# Allegro board RAK833_RPIGATEWAY.brd
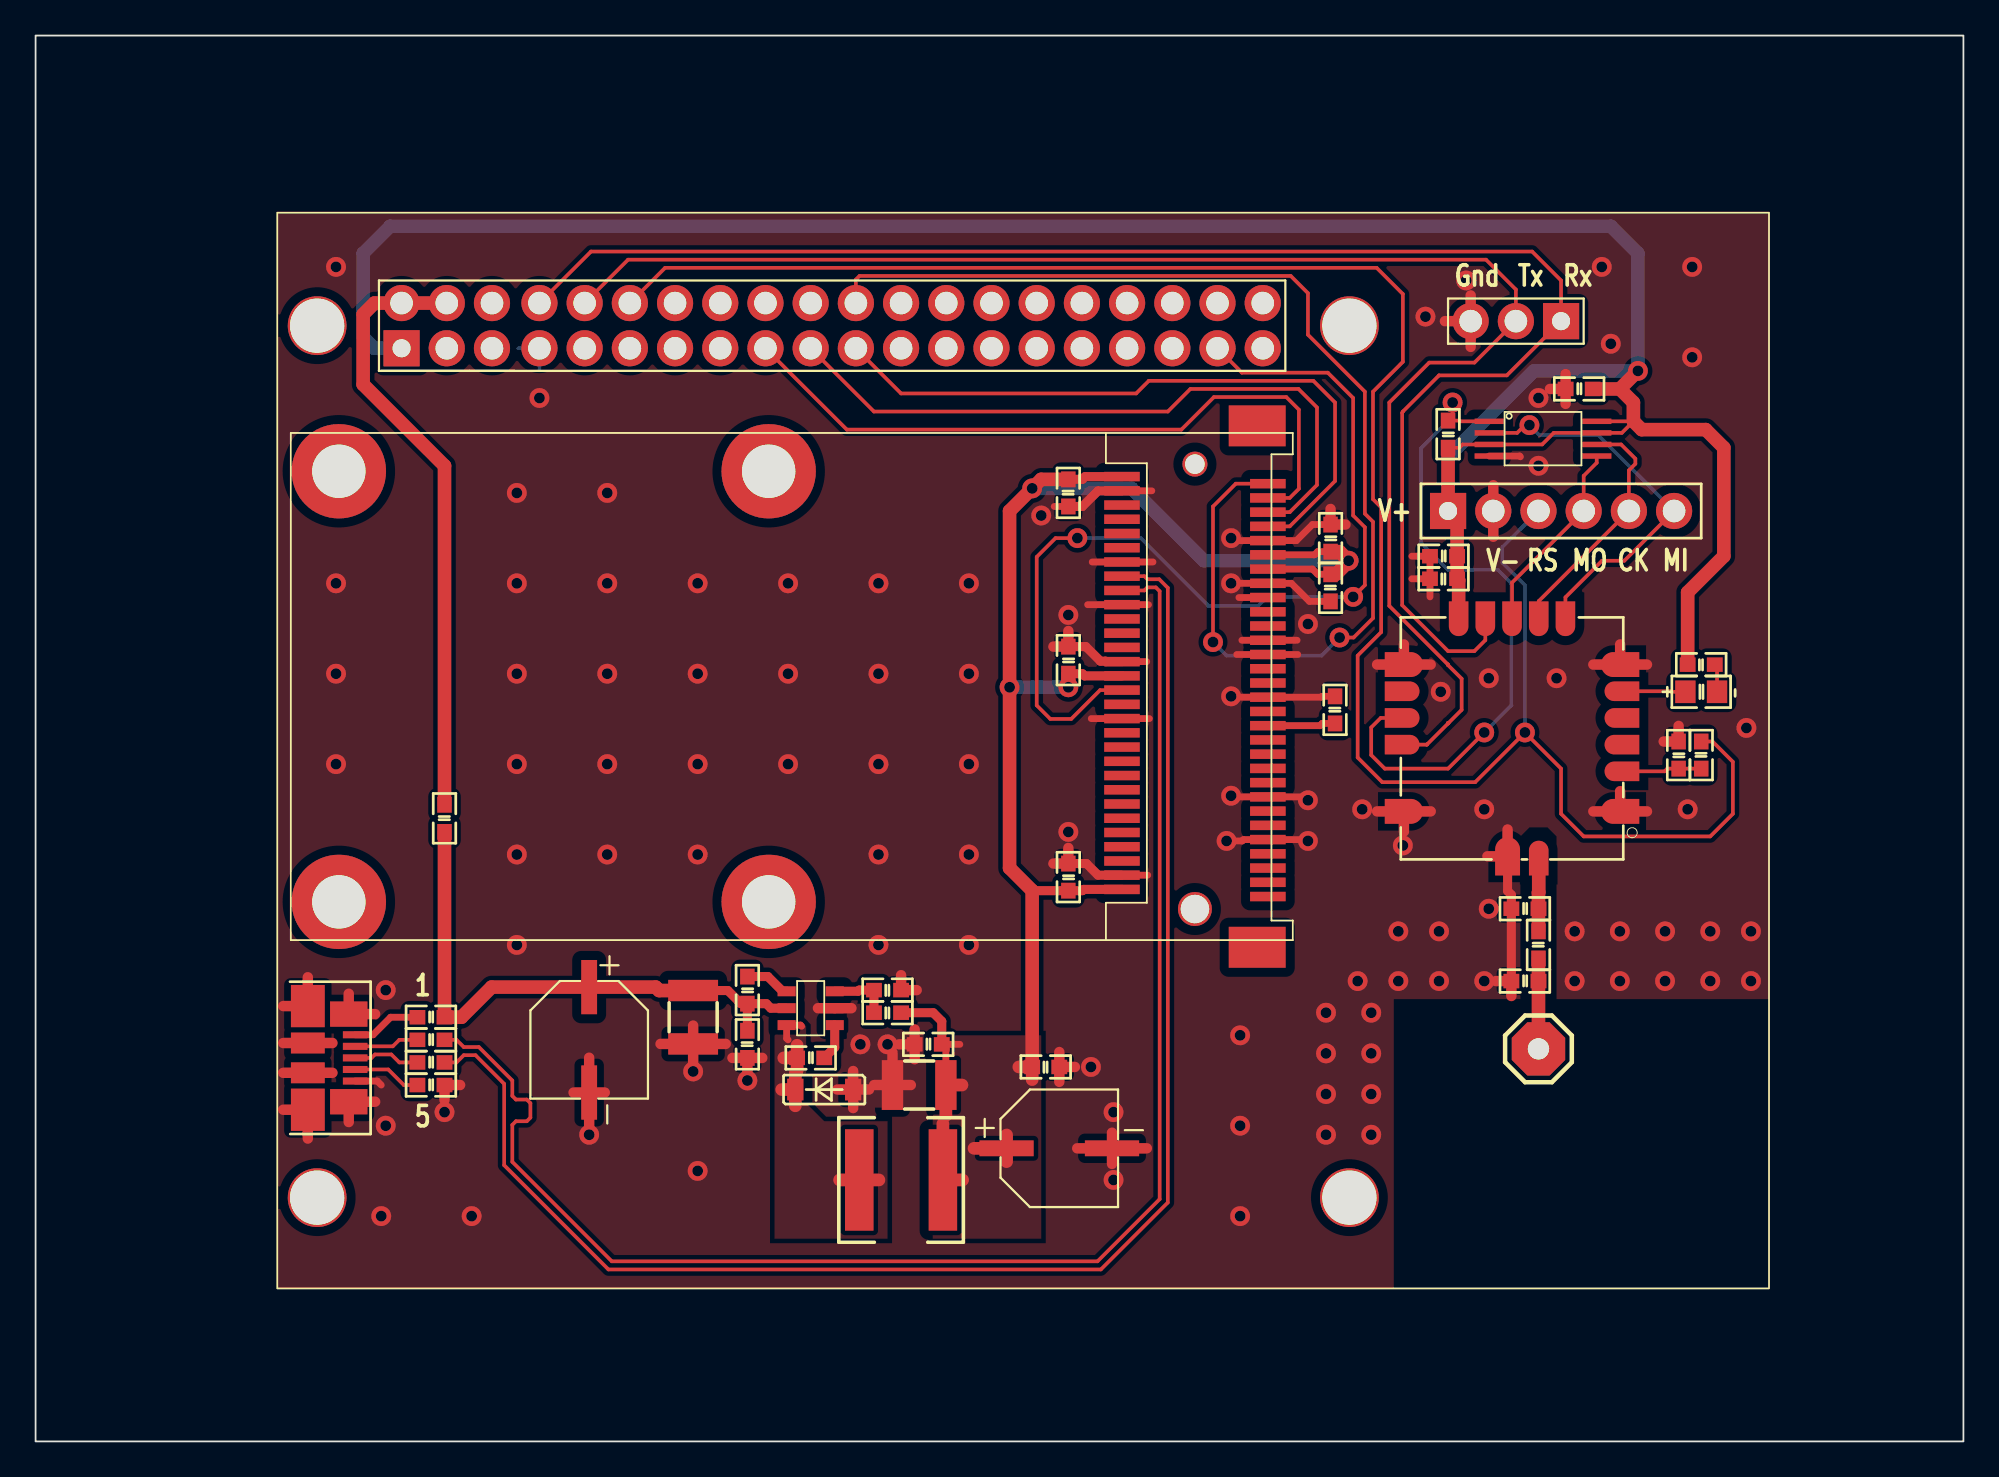
[diagram p0: board, top side]
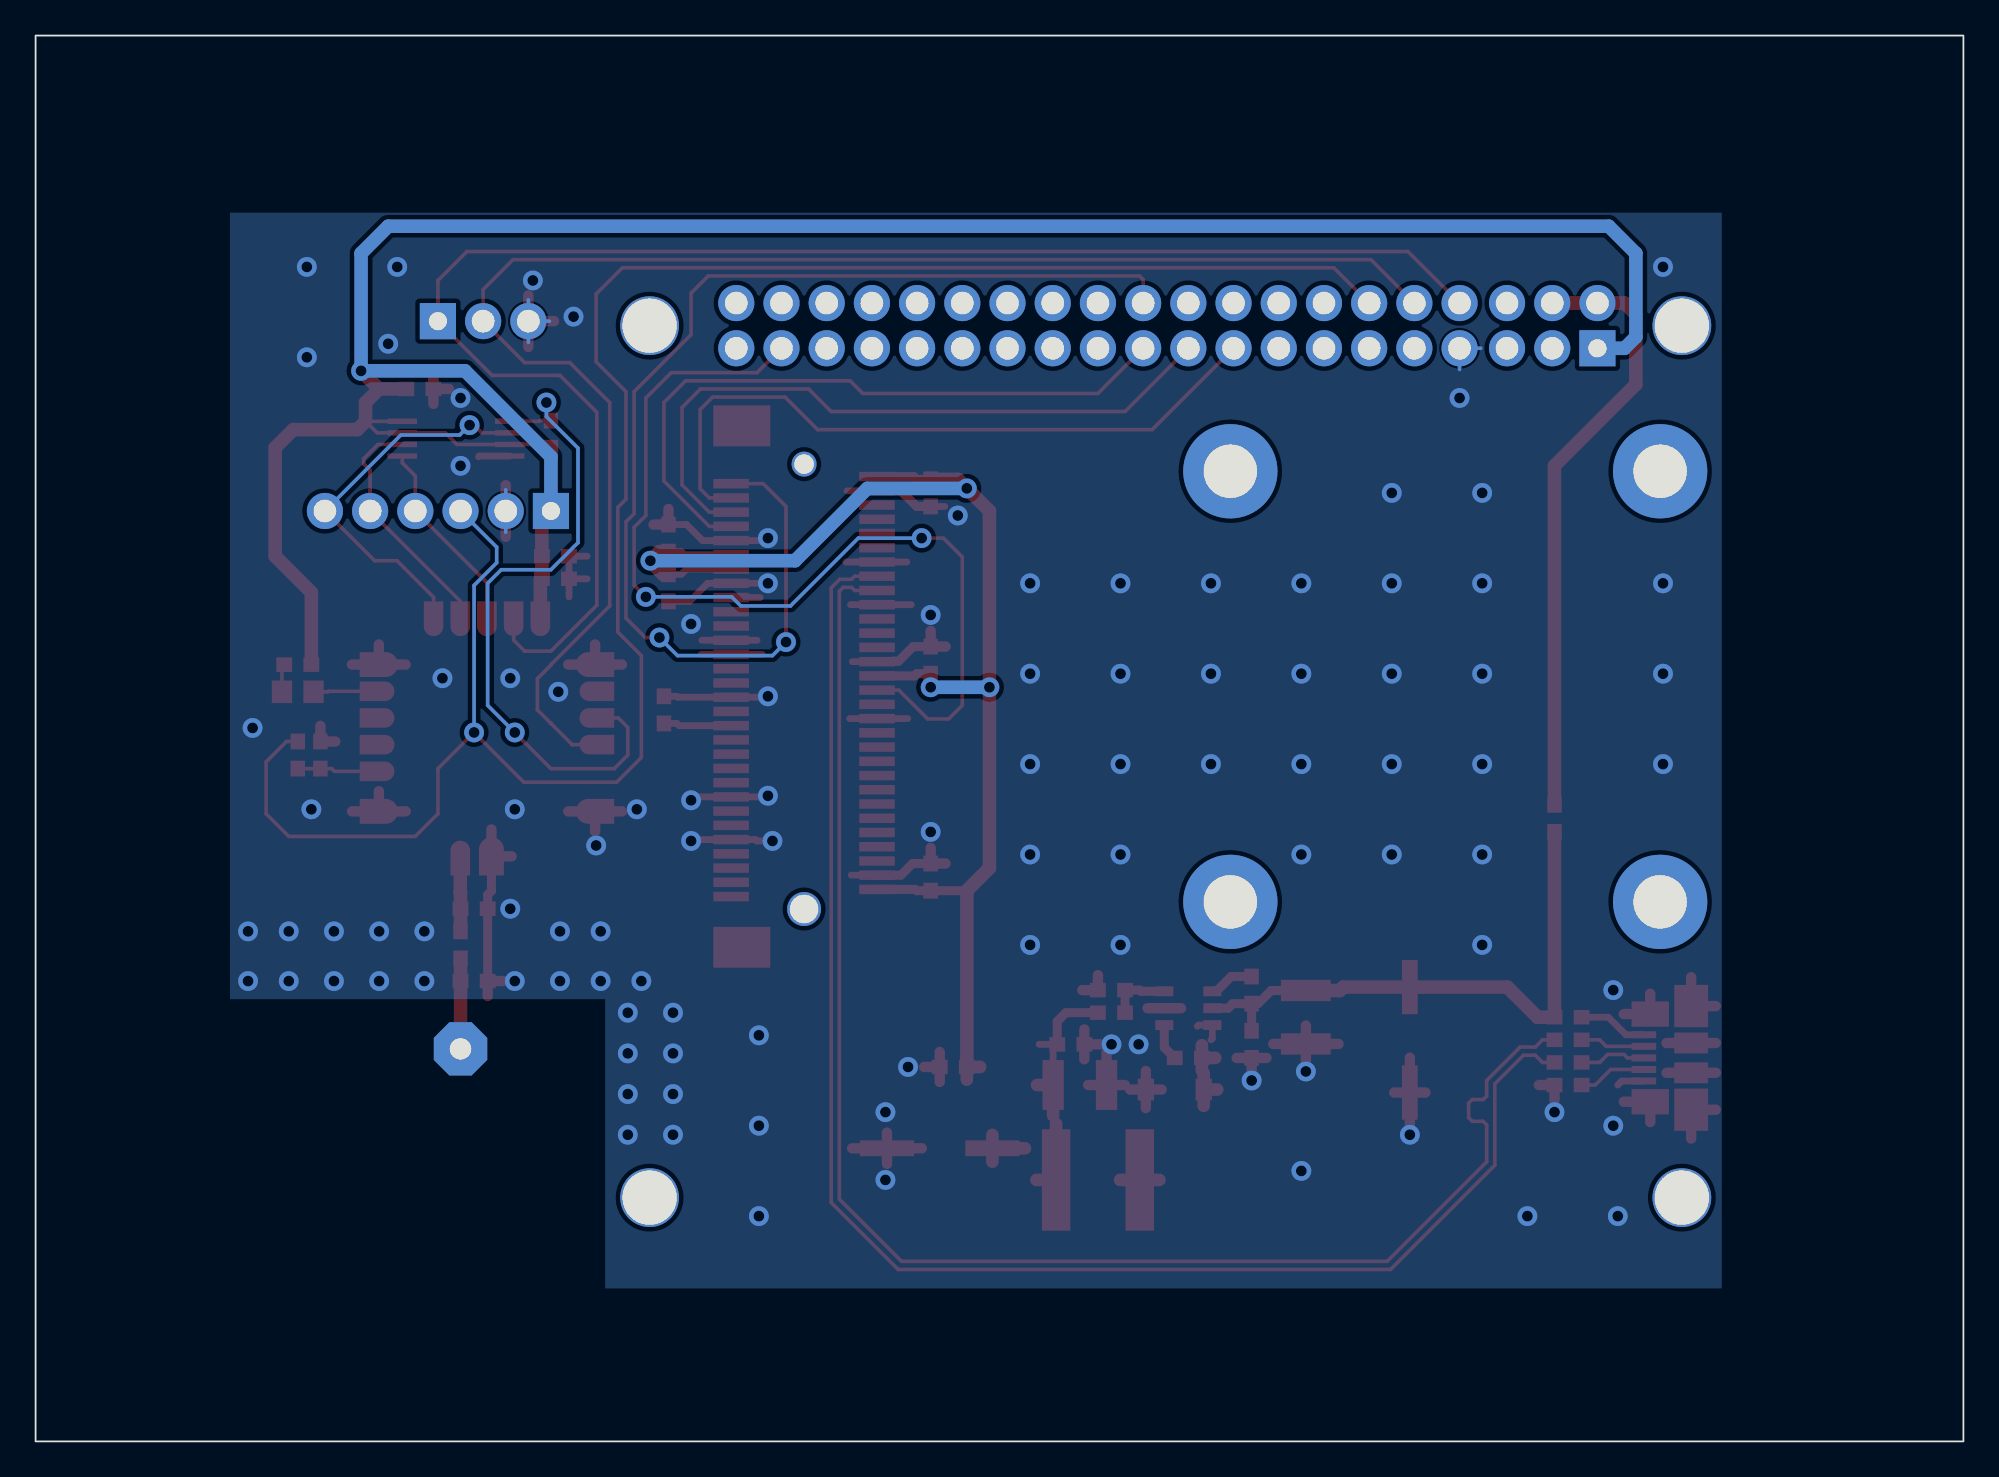
[diagram p1: board, bottom side, seen from below]

Outline 108.32 x 79 mm; copper layers: TOP, BOTTOM. Coordinates in mm from the lower left corner of the outline.
Outline path: rectangle 0,0 108.32,79

## Design rules (mm)
constraint set DEFAULT: min track width 0.203
net group MG1: nets USB_D+ USB_D-
net group MG2: nets USB_DM USB_DP

## Placement (name value [footprint] x y rotation side)
C1  10nF  [C0603]  43.55 21.55 180 top
C2  100uF/35V  [CAP_AL_D]  31.1 22.57 270 top
C3  100nF  [C0603]  39.99 22.31 270 top
C4  10u/35V  [CAP_1210]  36.95 23.84 270 top
C5  22u/6.3V  [CAP_1210]  49.65 20.03 180 top
C6  220u/16V  [CAP_AL_D]  57.52 16.47 0 top
C7  100nF  [C0603]  50.15 22.31 180 top
C8  10u/35V  [C0603]  58.03 53.3 270 top
C9  10u/35V  [C0603]  58.03 43.9 90 top
C10  10u/35V  [C0603]  58.03 31.71 90 top
C11  10u/35V  [C0603]  72.76 47.97 270 top
C12  10u/35V  [C0603]  72.76 50.76 90 top
C13  10u/35V  [C0603]  56.76 21.04 0 top
C14  0.1uF  [C0603]  79.11 48.47 0 top
C15  10uF  [C0603]  79.11 49.74 180 top
C16  0.1uF  [C0603]  92.32 38.57 90 top
C17  10pF  [C0603]  83.68 29.93 180 top
C18  6pF  [C0603]  83.68 25.87 180 top
C19  0.1uF  [C0603]  86.73 59.14 180 top
D1  1N5819  [SOD123]  44.31 19.77 0 top
D2  LED  [LED0805]  93.59 42.12 0 top
E1  ANTENNA  [HEADER_1_3MM]  84.44 22.06 0 top
J1  HEADER 20X2  [RASPERRY]  44.82 62.7 90 top
J2  HUM011D-5-S  [CON5_MICROUSB_SKT_SM]  16.63 21.55 0 top
J3  ZW_JTAG  [HEADER-6]  85.71 52.28 90 top
J14  Z_DBG  [HEADER3PITCH100MIL]  83.17 62.95 180 top
L1  8.8uH/1.7A  [IND_6X6MM]  48.63 14.69 0 top
L2  8.2nH  [C0603]  84.44 27.9 270 top
R1  10K  [R0603]  39.99 25.36 90 top
R2  30K  [R0603]  47.87 24.09 0 top
R3  10K  [R0603]  47.87 25.36 0 top
R4  0R/NC  [R0603]  22.98 35.01 270 top
R5  1R  [R0603]  73.01 41.11 270 top
R6  0R/NC  [R0603]  22.21 23.84 180 top
R7  22R  [R0603]  22.21 22.57 180 top
R8  22R  [R0603]  22.21 21.3 180 top
R9  0R/NC  [R0603]  22.21 20.03 180 top
R10  22  [R0603]  93.59 38.57 270 top
R11  360  [R0603]  93.59 43.65 0 top
R12  10K  [R0603]  79.36 56.6 90 top
U1  AP3211  [SOT23-6]  43.55 24.34 180 top
U2  RAK_PCIE  [CONN_PCIE_52POS]  65.14 38.57 90 top
U3  ZM5202  [ZM5202_A]  75.81 47.2 270 top
U4  CAT25256  [TSSOP-8]  84.7 56.35 0 top

## Library data of the parts
C1 C8-C14 C16 C19 = CAP NP
C2 C6 C15 = CAP
C3 C7 = Cap 0603
C4 C5 = CAP NP: User Part Number: PartNr
C17 = C-10pF/50V-SMD0805
C18 = C-6pF/50V-SMD0805
D1 = SS34_2
D2 = LED
E1 = ANTENNA_0
J1 = HEADER 20X2
J2 = USB MIN_6
J3 = HEADER 6
J14 = HEADER 3
L1 = INDUCTOR
L2 = L-8.2nH-SMD0805
R1-R3 R5 R10-R12 = RES-SM0402_0
R4 R6-R9 = RESISTOR
U1 = PMIC_SOT23-6
U2 = RAK_PCIE
U3 = ZM5202
U4 = CAT25C02_0

## Footprints (pads in the part's own frame, mm; a bottom-side part is the same pattern mirrored in y, then rotated)
C0603
  rect 0.889x0.813 smd: 1(-0.762,0) 2(0.762,0)
CAP_1210
  rect 1.2x2.8 smd: 1(-1.5,0) 2(1.5,0)
CAP_AL_D
  rect 3.048x0.889 smd: 1(-2.962,0) 2(2.962,0)
CON5_MICROUSB_SKT_SM
  rect 1.38x0.394 smd: 1(1.33,1.3) 2(1.33,0.65) 3(1.33,0) 4(1.33,-0.65) 5(1.33,-1.3)
  rect 1.9x1.175 smd: 6(-1.33,0.837) 11(-1.33,-0.837)
  rect 1.9x2.375 smd: 7(-1.33,2.913) 10(-1.33,-2.913)
  rect 2.1x1.422 smd: 8(0.97,2.463) 9(0.97,-2.463)
CONN_PCIE_52POS
  rect 2.301x3.2 smd: (-10.8,-3.5) (18.499,-3.5)
  round 1.905 hole 1.6 unplated: (-8.651,0)
  round 5.301 hole 3: (-8.25,48.1) (-8.25,23.95) (15.949,48.1) (15.949,23.95)
  round 1.405 hole 1.1 unplated: (16.35,0)
  rect 0.533x1.999 smd: 1(-7.95,-4.1) 2(-7.549,4.1) 3(-7.15,-4.1) 4(-6.749,4.1) 5(-6.35,-4.1) 6(-5.951,4.1) 7(-5.55,-4.1) 8(-5.151,4.1) 9(-4.75,-4.1) 10(-4.351,4.1) 11(-3.95,-4.1) 12(-3.551,4.1) 13(-3.15,-4.1) 14(-2.751,4.1) 15(-2.349,-4.1) 16(-1.951,4.1) 17(1.651,-4.1) 18(2.05,4.1) 19(2.451,-4.1) 20(2.85,4.1) 21(3.251,-4.1) 22(3.65,4.1) 23(4.051,-4.1) 24(4.45,4.1) 25(4.851,-4.1) 26(5.25,4.1) 27(5.652,-4.1) 28(6.05,4.1) 29(6.452,-4.1) 30(6.85,4.1) 31(7.252,-4.1) 32(7.651,4.1) 33(8.052,-4.1) 34(8.451,4.1) 35(8.852,-4.1) 36(9.251,4.1) 37(9.652,-4.1) 38(10.051,4.1) 39(10.452,-4.1) 40(10.851,4.1) 41(11.252,-4.1) 42(11.651,4.1) 43(12.052,-4.1) 44(12.451,4.1) 45(12.852,-4.1) 46(13.251,4.1) 47(13.65,-4.1) 48(14.049,4.1) 49(14.45,-4.1) 50(14.849,4.1) 51(15.25,-4.1) 52(15.649,4.1) A1(-1.549,-4.1) A2(-1.151,4.1) A3(-0.749,-4.1) A4(-0.35,4.1) A5(0.051,-4.1) A6(0.45,4.1) A7(0.851,-4.1) A8(1.25,4.1)
HEADER3PITCH100MIL
  rect 2.032x2.032 hole 1.016: 1(-2.54,0)
  round 2.032 hole 1.27: 2(0,0) 3(2.54,0)
HEADER-6
  rect 2.032x2.032 hole 1.016: 1(0,6.35)
  round 2.032 hole 1.27: 2(0,3.81) 3(0,1.27) 4(0,-1.27) 5(0,-3.81) 6(0,-6.35)
HEADER_1_3MM
  rrect 3x3 hole 1.2: 1(0,0)
IND_6X6MM
  rect 1.6x5.7 smd: 1(-2.35,0) 2(2.35,0)
LED0805
  rect 1.143x1.27 smd: 1(-0.889,0) 2(0.889,0)
R0603
  rect 0.889x0.813 smd: 1(-0.762,0) 2(0.762,0)
RASPERRY
  round 3.302 hole 3.048: (-49,29) (-49,-29) (0,29) (0,-29)
  rect 2.032x2.032 hole 1.016: 1(-1.27,24.257)
  round 2.032 hole 1.27: 2(1.27,24.257) 3(-1.27,21.717) 4(1.27,21.717) 5(-1.27,19.177) 6(1.27,19.177) 7(-1.27,16.51) 8(1.27,16.51) 9(-1.27,13.97) 10(1.27,13.97) 11(-1.27,11.43) 12(1.27,11.43) 13(-1.27,8.89) 14(1.27,8.89) 15(-1.27,6.35) 16(1.27,6.35) 17(-1.27,3.81) 18(1.27,3.81) 19(-1.27,1.27) 20(1.27,1.27) 21(-1.27,-1.27) 22(1.27,-1.27) 23(-1.27,-3.81) 24(1.27,-3.81) 25(-1.27,-6.35) 26(1.27,-6.35) 27(-1.27,-8.89) 28(1.27,-8.89) 29(-1.27,-11.43) 30(1.27,-11.43) 31(-1.27,-13.97) 32(1.27,-13.97) 33(-1.27,-16.51) 34(1.27,-16.51) 35(-1.27,-19.05) 36(1.27,-19.05) 37(-1.27,-21.59) 38(1.27,-21.59) 39(-1.27,-24.13) 40(1.27,-24.13)
SOD123
  rect 0.914x1.219 smd: 1(1.626,0) 2(-1.626,0)
SOT23-6
  rect 1.016x0.559 smd: 1(-1.35,0.95) 2(-1.35,0) 3(-1.35,-0.95) 4(1.35,-0.95) 5(1.35,0) 6(1.35,0.95)
TSSOP-8
  rect 1.651x0.305 smd: 1(-3.017,0.975) 2(-3.017,0.325) 3(-3.017,-0.325) 4(-3.017,-0.975) 5(3.017,-0.975) 6(3.017,-0.325) 7(3.017,0.325) 8(3.017,0.975)
ZM5202_A
  custom 1.4x2.15 smd: 1(11.8,13.225) 6(3.55,13.225) 12(3.55,1.075) 16(11.8,1.075)
  custom 1.1x1.95 smd: 2(9.55,13.325) 3(8.05,13.325) 4(6.55,13.325) 5(5.05,13.325) 13(5.05,0.975) 14(6.55,0.975) 15(8.05,0.975)
  custom 1.95x1.1 smd: 7(0.975,10.15) 8(0.975,8.65) 9(0.975,7.15) 10(0.975,5.65) 11(0.975,4.15) 18(14.425,8.65)
  custom 2.15x1.4 smd: 17(14.325,6.9)

## Nets
3.3V: C5.1 C6.1 C7.1 C8.1 C9.1 C10.1 C11.1 C12.1 C13.1 L1.2 R2.2 U2.2 U2.24 U2.39 U2.41 U2.52
GND: C2.2 C3.2 C4.2 C5.2 C6.2 C7.2 C8.2 C9.2 C10.2 C11.2 C12.2 C13.2 C14.1 C15.2 C16.2 C17.2 C18.2 C19.2 D1.1 J1.7 J2.5 J2.6 J2.7 J2.8 J2.9 J2.10 J2.11 J3.2 J14.3 R3.2 R5.1 R9.1 U1.2 U2.4 U2.9(PIN9) U2.15 U2.18 U2.21 U2.26 U2.27 U2.29 U2.34 U2.35 U2.37 U2.40 U2.43 U2.50 U3.1 U3.6 U3.12 U3.16 U3.17 U4.4
VCC3.3V: C14.2 C15.1 C19.1 J1.1 J3.1 R11.1 R12.1 U3.11 U4.3(W\P\) U4.7 U4.8
VCC5V: C2.1 C3.1 C4.1 R1.1 R4.2 R6.1 U1.5
ANTEN: C18.1 E1.1 L2.2
EXTERNALGPS: U2.19
LED: D2.1(CATHODE) U3.5
RF: C17.1 L2.1 U3.18
SPDT_SEL: R5.2 U2.17
SPI_CE: J1.22 U2.51
SPI_CLK: J1.21 U2.45
SPI_MISO: J1.19 U2.47
SPI_MOSI: J1.17 U2.49
SPI_RST: J1.37 U2.22
USB_D+: R8.1 U2.38
USB_D-: R7.1 U2.36
USB_DM: J2.2 R7.2
USB_DP: J2.3 R8.2
ZM_INT0: U3.3
ZM_INT1: U3.4
ZM_RESET: J1.12 J3.3 R10.1
ZM_RX: J1.8 J14.1 U3.10
ZM_TX: J1.10 J14.2 U3.15
ZWAVE_SPI_CS: R12.2 U3.14(ZEROX) U4.1
ZWAVE_SPI_MISO: J3.6 U3.7 U4.2
ZWAVE_SPI_MOSI: J3.4 U3.9 U4.5
ZWAVE_SPI_SCLK: J3.5 U3.8 U4.6
N7996678: C1.1 U1.1
N7996682: C1.2 D1.2(CATHODE) L1.1 U1.6(SW)
N7996842: R1.2 U1.4
N7996854: R2.1 R3.1 U1.3
N7997918: C16.1 R10.2 U3.2
N7999815: J2.1 R6.2
N7999903: J2.4(ID) R9.2
N8000066: J1.2 J1.4 R4.1
N79981601: D2.2 R11.2

Pads without a net: J1 3 5 6 9 11 13 14 15 16 18 20 23 24 25 26 27 28 29 30 31 32 33 34 35 36 38 39 40; U2 1 3 5 6 7 8 10 11 12 13 14 16 20 23 25 28 30 31 32 33 42 44 46 48 A1 A2 A3 A4 A5 A6 A7 A8; U3 13

## Via types
v1: diameter 1.118, hole 0.61, TOP to BOTTOM, 115 vias

## Routing (per net, layer and track width the routed paths; a pad name or vN(x,y) marks a point on that pad's centre or on a via; arc(x,y) is an arc through that point)
3.3V: length 99.2
  TOP w0.381: C5.1 51.15,22.08 C7.1 51.93,22.31 ; C12.1 72.04,50 71.86,49.82 U2.41 ; U2.39 71.74,49.02 72.04,48.73 C11.1
  TOP w0.508: C8.1 58.82,54.06 58.97,54.22 U2.52 ; R2.2 50.43,24.09 50.92,23.61 C7.1 ; C9.1 58.82,43.14 58.94,43.02 U2.24 ; U2.2 58.89,31.02 58.82,30.95 C10.1 56,30.95
  TOP w0.711: 50.98,17.85 L1.2 52.08,14.69 ; 56,20.33 C13.1 55.25,21.04 ; 51.15,18.32 C5.1 52.05,20.03 ; 54.56,15.72 C6.1 ; C6.1 54.56,17.22 ; C6.1 52.73,16.47
  TOP w0.762: C13.1 56,30.95 54.73,32.22 v1(54.73,42.38) 54.73,52.28 v1(56,53.55) 56.5,54.06 C8.1 ; C11.1 73.06,48.73 73.78,49.45 v1(73.78,49.49) 73.27,50 C12.1 ; C9.1 v1(58.03,42.38)
  BOTTOM w0.762: v1(56,53.55) 61.58,53.55 65.65,49.49 v1(73.78,49.49) ; v1(58.03,42.38) v1(54.73,42.38)
GND: length 175.8
  TOP w0.381: U2.50 62.72,53.42 ; 70.88,45.02 U2.29 67.78,45.02 ; U2.35 67.61,47.42 ; v1(67.17,50.76) 67.31,50.62 U2.43 70.84,50.62 71.74,51.52 C12.2 ; C14.1 77.33,48.47 ; C14.1 78.35,47.46 ; C14.1 C15.2 77.33,49.74 ; v1(67.17,48.22) U2.37 70.56,48.22 71.57,47.2 C11.2 ; U4.4 83.39,55.37 83.43,55.33 ; 59.37,49.42 U2.40 62.78,49.42 ; 67.49,44.22 U2.27 70.92,44.22 ; 19.42,20.03 19.2,20.25 J2.5 ; v1(67.17,41.87) 67.22,41.82 U2.21 72.24,41.82 72.29,41.87 R5.1 ; C8.2 57.24,52.54 ; v1(66.92,33.74) 67.79,33.74 67.87,33.82 U2.9 71.41,33.82 v1(71.49,33.74) ; U2.26 62.43,43.82 ; 62.53,47.02 U2.34 59.11,47.02 ; U2.4 62.49,31.82 ; v1(67.17,36.28) 67.24,36.22 U2.15 71.3,36.22 v1(71.49,36.03) ; 59.32,40.62 U2.18 62.58,40.62
  TOP w0.508: U2.4 59.7,31.82 59.04,32.47 C10.2 ; U2.26 60.14,43.82 60.12,43.84 59.83,43.84 59.01,44.66 C9.2 ; U2.50 59.69,53.42 58.82,52.54 C8.2 ; C18.2 C17.2 82.92,30.72 82.71,30.93 U3.17
  TOP w0.584: 22.98,19.19 R9.1 23.85,20.03 ; 58.03,33.35 C10.2 57.19,32.47 ; 82.04,25.87 C18.2 82.92,25.03 ; 81.9,53.73 J3.2 81.9,50.84 ; C5.2 49.18,20.03 ; C5.2 47.11,20.03 ; C5.2 48.15,21.86 ; U3.16 78.39,35.4 ; U3.16 75.38,35.4 ; U3.16 76.88,34.27 ; 43.96,24.34 U1.2 45.84,24.34 ; 16.68,20.71 J2.11 13.91,20.71 ; U3.6 90.54,43.65 ; U3.6 87.53,43.65 ; U3.6 89.03,44.79 ; 13.91,18.64 J2.10 15.3,17.02 ; C13.2 58.4,21.04 ; C13.2 57.52,21.88 ; C13.2 57.52,20.2 ; 85.09,59.14 C19.2 ; C19.2 85.97,59.98 ; C19.2 85.97,58.3 ; 13.91,24.46 J2.7 15.3,26.08 ; 30.23,19.6 C2.2 ; C2.2 31.1,17.65 ; C2.2 31.98,19.6 ; C2.2 31.1,21.56 ; U3.1 90.54,35.4 ; U3.1 89.03,36.54 ; U3.1 87.53,35.4 ; 81.58,32.88 U3.17 82.71,34.39 ; 60.48,15.59 C6.2 ; C6.2 62.44,16.47 ; C6.2 58.53,16.47 ; C6.2 60.48,17.35 ; 49.39,21.47 C7.2 ; C7.2 48.52,22.31 ; C7.2 49.39,23.15 ; 19.08,19.09 J2.9 17.6,17.95 ; 73.6,51.52 C12.2 72.76,52.4 ; 39.16,21.55 C3.2 ; C3.2 40.83,21.55 ; C3.2 39.99,20.67 ; D1.1 46.83,19.77 ; D1.1 45.94,18.73 ; D1.1 45.94,20.81 ; D1.1 45.05,19.77 ; C4.2 36.95,23.37 ; C4.2 35.11,22.34 ; C4.2 36.95,21.3 ; C4.2 38.78,22.34 ; 79.19,62.95 J14.3 ; J14.3 80.63,61.5 ; J14.3 80.63,64.4 ; 48.63,26.2 R3.2 49.51,25.36 ; U3.12 76.88,44.79 ; U3.12 78.39,43.65 ; U3.12 75.38,43.65 ; 19.08,24.01 J2.8 17.6,25.16 ; 58.03,45.54 C9.2 57.19,44.66 ; 16.68,22.39 J2.6 13.91,22.39 ; 92.32,40.21 C16.2 91.48,39.33
  BOTTOM w0.203: 81.9,51.09 J3.2 81.9,53.48 ; J14.3 80.63,64.15 ; J14.3 79.44,62.95 ; J14.3 80.63,61.76 ; 28.31,60.23 J1.7 27.12,61.43
  vias: v1(16.88,66) v1(16.88,48.22) v1(16.88,43.14) v1(16.88,38.06) v1(19.42,12.66) v1(19.67,25.36) v1(19.67,17.74) v1(22.98,18.5) v1(24.5,12.66) v1(27.04,53.3) v1(27.04,48.22) v1(27.04,43.14) v1(27.04,38.06) v1(27.04,32.98) v1(27.04,27.9) v1(28.31,58.63) v1(31.1,17.23) v1(32.12,53.3) v1(32.12,48.22) v1(32.12,43.14) v1(32.12,38.06) v1(32.12,32.98) v1(36.95,20.79) v1(37.2,48.22) v1(37.2,43.14) v1(37.2,38.06) v1(37.2,32.98) v1(37.2,15.2) v1(39.99,20.28) v1(42.28,48.22) v1(42.28,43.14) v1(42.28,38.06) v1(46.34,22.31) v1(47.36,48.22) v1(47.36,43.14) v1(47.36,38.06) v1(47.36,32.98) v1(47.36,27.9) v1(47.87,22.31) v1(52.44,48.22) v1(52.44,43.14) v1(52.44,38.06) v1(52.44,32.98) v1(52.44,27.9) v1(56.5,52.03) v1(58.03,46.44) v1(58.03,34.25) v1(59.3,21.04) v1(60.57,18.5) v1(60.57,14.69) v1(67.68,22.82) v1(67.68,17.74) v1(67.68,12.66) v1(71.49,45.93) v1(72.51,24.09) v1(72.51,21.8) v1(72.51,19.52) v1(72.51,17.23) v1(74.28,25.87) v1(74.54,35.52) v1(75.05,24.09) v1(75.05,21.8) v1(75.05,19.52) v1(75.05,17.23) v1(76.57,28.66) v1(76.57,25.87) v1(76.82,33.49) v1(78.09,63.21) v1(78.86,28.66) v1(78.86,25.87) v1(78.95,42.12) v1(80.38,65.24) v1(81.4,35.52) v1(81.4,25.87) v1(81.65,42.89) v1(81.65,29.93) v1(84.44,58.63) v1(84.44,54.82) v1(85.46,42.89) v1(86.48,28.66) v1(86.48,25.87) v1(88,66) v1(88.51,61.68) v1(89.02,28.66) v1(89.02,25.87) v1(91.56,28.66) v1(91.56,25.87) v1(92.83,35.52) v1(93.08,66) v1(93.08,60.92) v1(94.1,28.66) v1(94.1,25.87) v1(96.13,40.09) v1(96.38,28.66) v1(96.38,25.87)
VCC3.3V: length 149.1
  TOP w0.203: U4.8 89.78,57.32 89.13,56.67 U4.7 85.3,56.67 84.65,56.02 U4.3 80.18,56.02 80,55.84 R12.1
  TOP w0.762: 89.02,59.14 C19.1 ; 89.02,59.14 89.78,58.38 89.78,57.32 90.25,56.86 93.84,56.86 94.86,55.84 94.86,49.74 92.83,47.71 R11.1 ; 89.02,59.14 v1(90.03,60.16) ; U3.11 79.96,48.39 C14.2 C15.1 79.87,51.78 J3.1 R12.1
  BOTTOM w0.762: 20.56,61.43 19.04,61.43 18.4,62.06 18.4,66.76 19.93,68.29 88.51,68.29 90.03,66.76 v1(90.03,60.16) 84.19,60.16 79.36,55.33 J3.1
VCC5V: length 32.4
  TOP w0.508: C4.1 38.9,25.34 39.63,24.6 R1.1 ; R1.1 C3.1 ; R1.1 41.06,24.6 41.31,24.34 U1.5
  TOP w0.762: R4.2 R6.1 23.93,23.84 25.62,25.53 C2.1 34.85,25.53 35.04,25.34 C4.1
ANTEN: length 5.1
  TOP w0.762: E1.1 C18.1 L2.2
LED: length 3.6
  TOP w0.203: U3.5 91.87,42.15 91.9,42.12 92.7,42.12
RF: length 4.1
  TOP w0.762: U3.18 84.46,30.86 84.44,30.85 C17.1 L2.1
SPDT_SEL: length 3.8
  TOP w0.381: R5.2 72.29,40.35 72.16,40.22 U2.17
SPI_CE: length 68.4
  TOP w0.203: J1.22 46.09,65.29 46.29,65.49 70.52,65.49 71.49,64.53 71.49,62.19 74.69,58.99 74.69,52.13 75.15,51.68 75.15,46.26 74.06,45.17 v1(73.27,45.17) ; U2.51 67.44,53.82 66.16,52.54 v1(66.16,44.92)
  BOTTOM w0.203: v1(66.16,44.92) 66.92,44.16 72.25,44.16 v1(73.27,45.17)
SPI_CLK: length 38
  TOP w0.203: J1.21 48.63,58.89 61.84,58.89 62.55,59.6 71.79,59.6 73.01,58.38 73.01,53.97 70.47,51.42 U2.45
SPI_MISO: length 38.6
  TOP w0.203: U2.47 70.47,52.22 72,53.75 72,58.1 70.96,59.14 64.89,59.14 63.62,57.87 47.11,57.87 J1.19
SPI_MOSI: length 39.3
  TOP w0.203: U2.49 70.47,53.02 70.98,53.53 70.98,57.98 70.28,58.69 66.21,58.69 64.38,56.86 45.58,56.86 J1.17
SPI_RST: length 54.6
  TOP w0.203: v1(74.03,47.46) 74.69,48.12 74.69,51.37 74.03,52.03 74.03,58.63 72.61,60.06 67.78,60.06 J1.37 ; v1(58.54,50.76) 57.31,50.76 56.25,49.7 56.25,41.36 57.01,40.6 58.19,40.6 59.81,42.22 U2.22
  BOTTOM w0.203: v1(74.03,47.46) 69.2,47.46 68.7,46.95 65.9,46.95 62.09,50.76 v1(58.54,50.76)
USB_D+: length 87.4
  TOP w0.203: U2.38 62.3,48.62 62.47,48.45 63.13,48.45 63.62,47.97 63.62,13.42 59.86,9.66 32.18,9.66 26.33,15.52 26.33,20.09 24.72,21.7 24.06,21.7 23.65,21.3 R8.1
USB_D-: length 87.5
  TOP w0.203: U2.36 62.3,47.82 62.47,47.99 62.95,47.99 63.16,47.78 63.16,13.61 59.67,10.12 32.37,10.12 26.79,15.71 26.79,17.79 26.99,17.99 27.6,17.99 27.8,18.19 27.8,19.01 27.6,19.21 26.99,19.21 26.79,19.41 26.79,20.28 24.91,22.16 24.06,22.16 23.65,22.57 R7.1
USB_DM: length 3.6
  TOP w0.203: J2.2 20.07,22.2 20.44,22.57 R7.2
USB_DP: length 3.8
  TOP w0.203: J2.3 18.87,21.55 19.07,21.74 19.99,21.74 20.44,21.3 R8.2
ZM_RESET: length 118.6
  TOP w0.203: J1.12 35.37,65.95 75.35,65.95 76.82,64.48 76.82,60.67 75.15,58.99 75.15,52.95 75.6,52.49 75.6,45.48 74.28,44.16 74.28,38.43 75.67,37.04 80.89,37.04 v1(83.68,39.84) 85.71,37.81 85.71,35.27 86.98,34 94.1,34 95.37,35.27 95.37,38.19 94.22,39.33 R10.1
  BOTTOM w0.203: v1(83.68,39.84) 83.68,48.11 82.41,49.38 82.41,50.25 J3.3
ZM_RX: length 90.6
  TOP w0.203: U3.10 81.46,45.03 80.84,44.41 79.36,44.41 76.79,46.99 76.79,57.8 76.82,57.86 76.84,57.88 78.85,59.9 78.86,59.9 82.67,59.9 J14.1 85.71,65.24 84.09,66.86 31.21,66.86 J1.8
ZM_TX: length 87.9
  TOP w0.203: J1.10 33.29,66.41 81.5,66.41 83.17,64.73 J14.2 80.84,60.62 78.3,60.62 76.06,58.38 76.06,46.95 79.34,43.67 79.35,43.66 79.36,43.65 79.36,43.64 79.36,43.62 80.13,42.86 80.13,41.11 79.4,40.38 79.39,40.38 79.36,40.38 79.36,40.36 79.36,40.35 79.35,40.34 79.35,40.33 78.2,39.18 78.19,39.17 78.17,39.16 78.16,39.16 78.15,39.15 U3.15
ZWAVE_SPI_CS: length 38.1
  TOP w0.203: U4.1 80.04,57.32 80,57.36 R12.2 79.62,57.62 v1(79.62,58.38) ; v1(81.4,39.84) 79.36,37.81 75.81,37.81 75.05,38.57 75.05,40.12 75.58,40.65 U3.14
  BOTTOM w0.203: v1(81.4,39.84) 82.92,41.36 82.92,48.22 82.16,48.98 79.36,48.98 77.84,50.51 77.84,55.82 79.62,57.59 v1(79.62,58.38)
ZWAVE_SPI_MISO: length 21.9
  TOP w0.203: U3.7 85.96,47.43 88.02,49.49 89.27,49.49 J3.6 ; v1(83.94,57.11) 83.68,57.11 83.25,56.67 U4.2
  BOTTOM w0.203: v1(83.94,57.11) 84.49,56.55 87.79,56.55 J3.6
ZWAVE_SPI_MOSI: length 11.1
  TOP w0.203: U3.9 82.96,48.26 J3.4 86.98,54.26 87.72,54.99 U4.5
ZWAVE_SPI_SCLK: length 13.7
  TOP w0.203: U3.8 84.46,47.22 J3.5 89.52,54.57 89.89,54.93 89.89,55.22 89.09,56.02 U4.6
N7996678: length 2.1
  TOP w0.508: C1.1 44.9,22.14 U1.1
N7996682: length 8.7
  TOP w0.381: 43.04,23.33 42.98,23.39 U1.6 42.2,22.65 42.28,22.57
  TOP w0.711: 42.69,18.86 D1.2 ; D1.2 41.92,19.77 ; D1.2 42.69,20.69 ; 47.38,14.69 L1.1 45.18,14.69 ; C1.2 42.79,22.26 ; C1.2 42.04,21.55 ; C1.2 42.79,20.84
N7996842: length 2.5
  TOP w0.508: R1.2 41.14,26.12 41.97,25.29 U1.4
N7996854: length 3.5
  TOP w0.508: R2.1 R3.1 46.28,25.36 46.21,25.29 U1.3
N7997918: length 4.5
  TOP w0.203: U3.2 91.53,37.65 91.68,37.81 C16.1 R10.2
N7999815: length 3.9
  TOP w0.381: R6.2 19.95,23.84 18.96,22.85 J2.1
N7999903: length 3.9
  TOP w0.203: J2.4 19.82,20.9 20.69,20.03 R9.2
N8000066: length 34.4
  TOP w0.762: 23.1,63.97 19.04,63.97 18.4,63.33 18.4,59.4 22.98,54.82 R4.1
N79981601: length 1.6
  TOP w0.203: D2.2 94.48,43.52 R11.2

## Copper pours and planes (outline as drawn; the poured copper is in the pictures)
3.3V on TOP: 50.41,22.82 50.41,11.39 56.5,11.39 56.5,22.82
GND on TOP: 44.57,24.09 45.58,24.09 45.58,19.26 46.09,18.76 49.65,18.76 49.65,21.55 49.9,21.8 49.9,23.07 46.6,23.07 46.34,23.33 46.34,24.6 44.57,24.6
GND on TOP: 13.58,69.05 97.4,69.05 97.4,24.85 85.46,24.85 85.46,34 84.95,34.5 83.94,34.5 83.43,34 83.43,24.85 76.32,24.85 76.32,8.6 13.58,8.6 ; 21 cut-outs
GND on BOTTOM: 13.58,69.05 97.4,69.05 97.4,24.85 76.32,24.85 76.32,8.6 13.58,8.6 ; 17 cut-outs
N7996682 on TOP: 41.77,23.84 42.79,23.84 43.3,23.33 43.3,19.01 44.31,17.99 47.87,17.99 47.87,11.39 41.52,11.39 41.52,23.58

## Text on the board
Ref Des/Silkscreen Top: V+ | Gnd | V- | Tx | RS | Rx | MO | CK | MI
